# Altium PCB Doorsensor_433MHz.PcbDoc
Units mil, origin at the board's own origin, x right, y up, seen from the top; angles counter-clockwise.
Board outline 1113.09 x 1908.09 mil, 2 copper layers (Top Layer, Bottom Layer); 26 components, 14 nets, 61 pads, 71 vias.
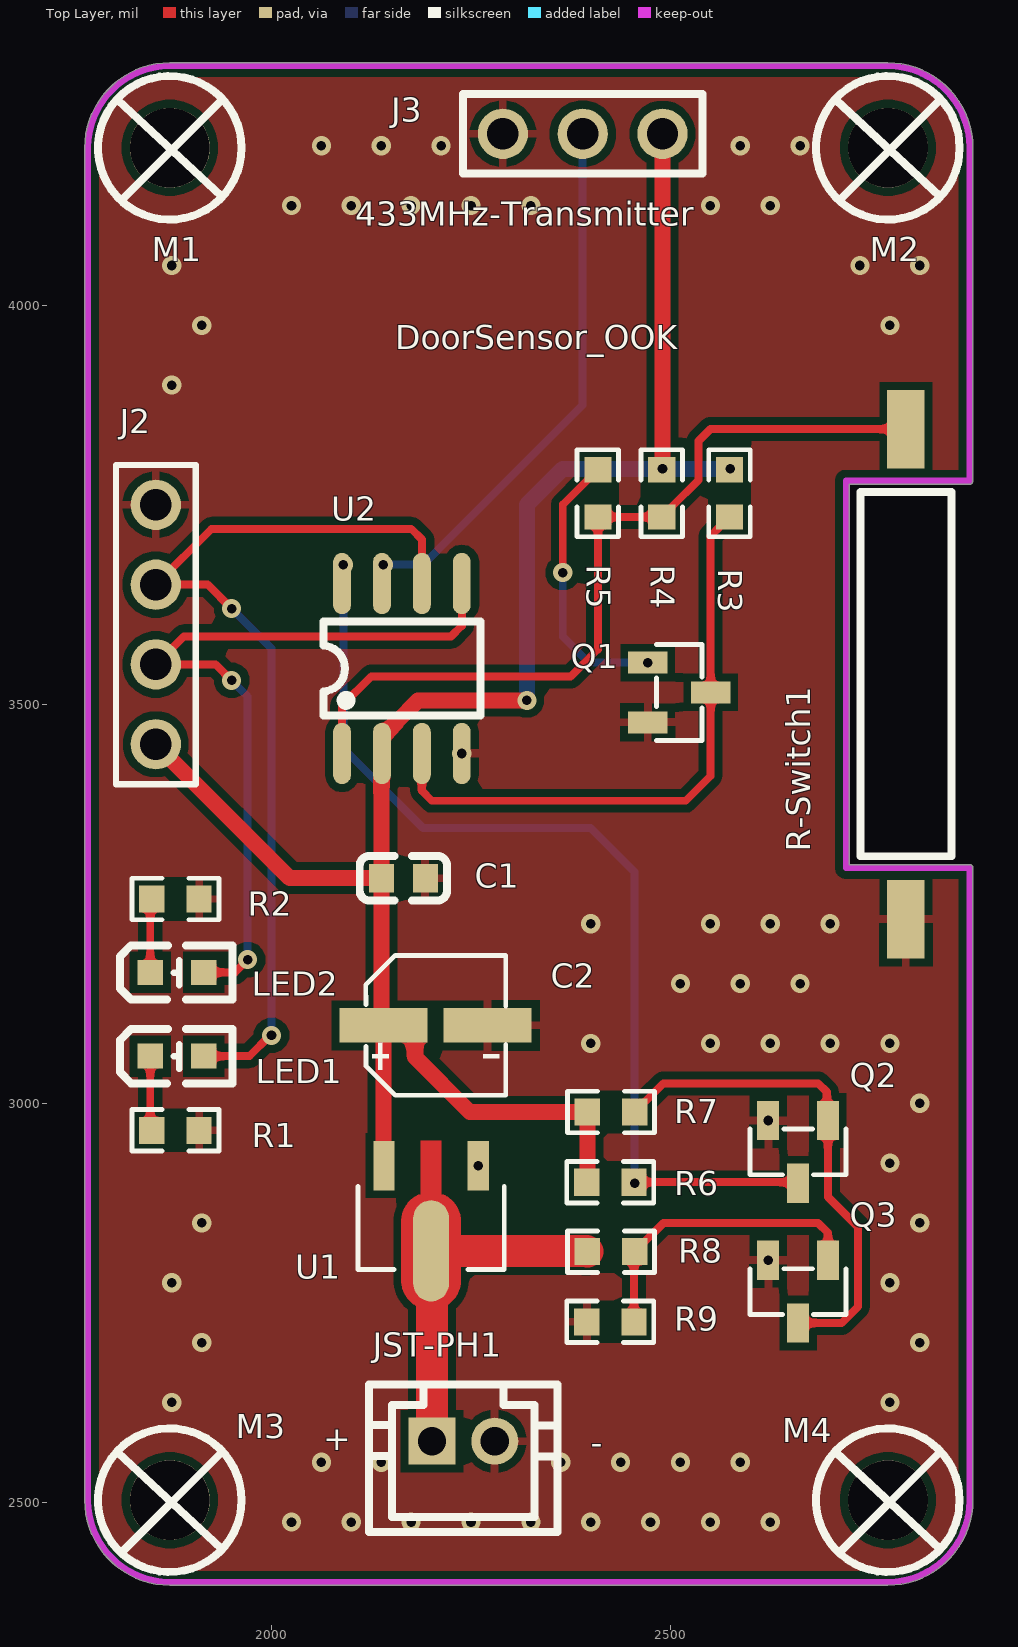
[diagram p0: Top Layer view]
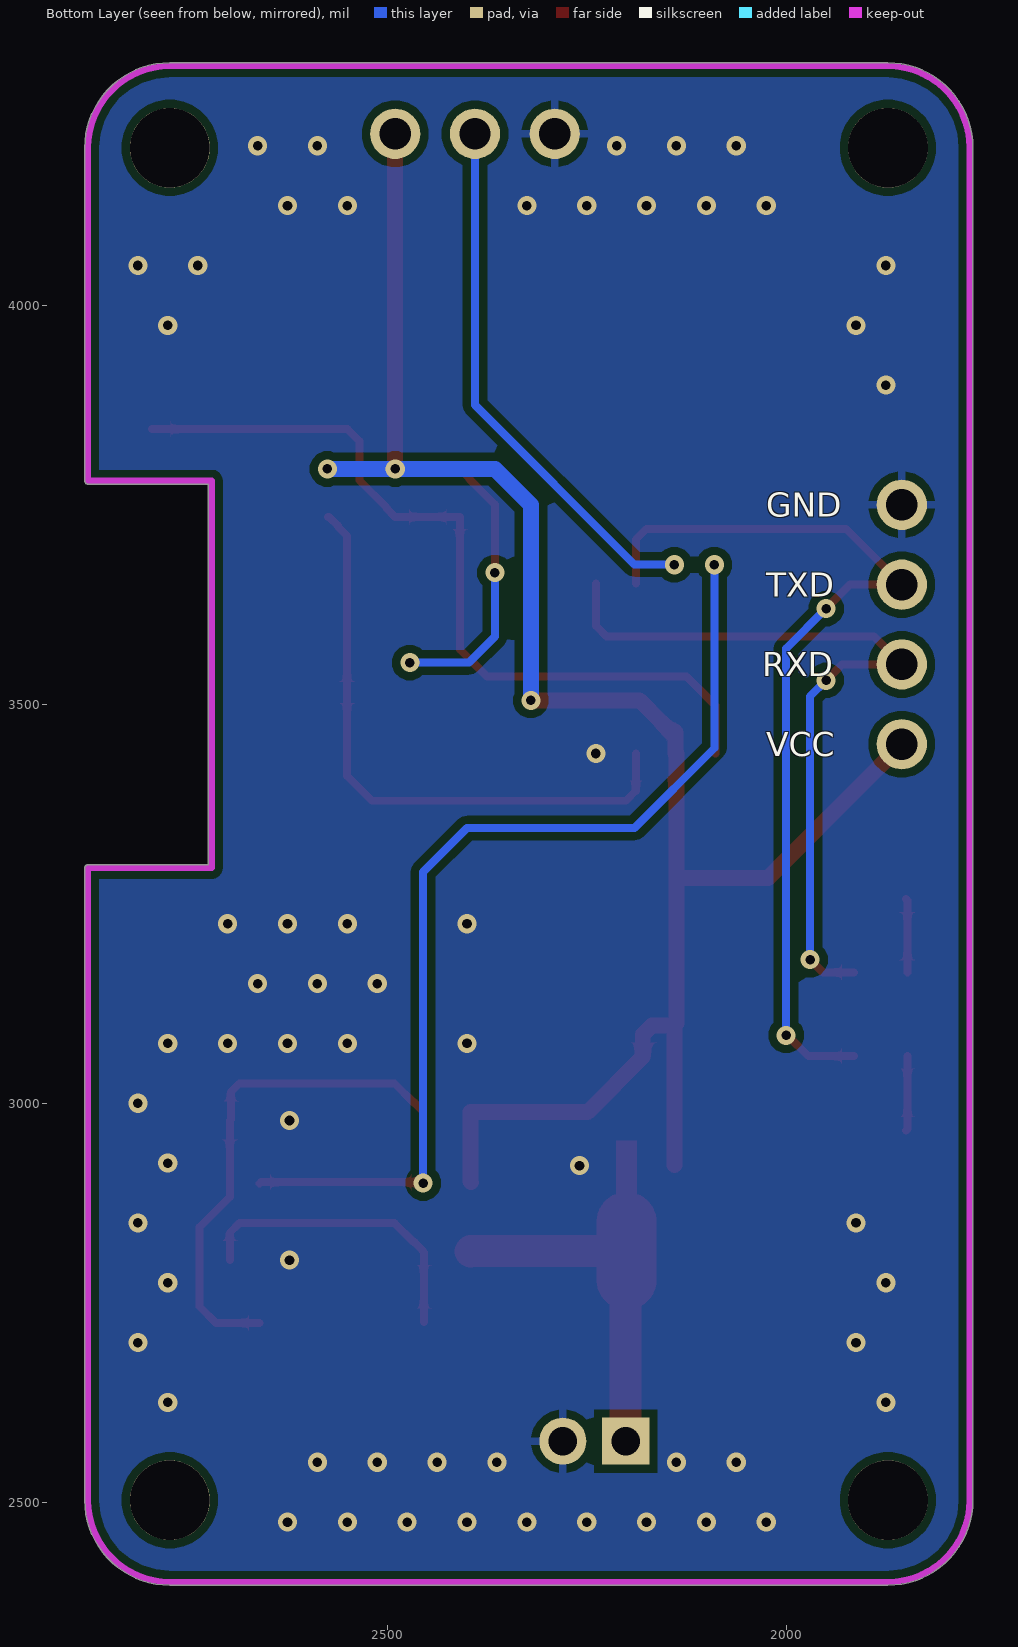
[diagram p1: Bottom Layer view, seen from below]
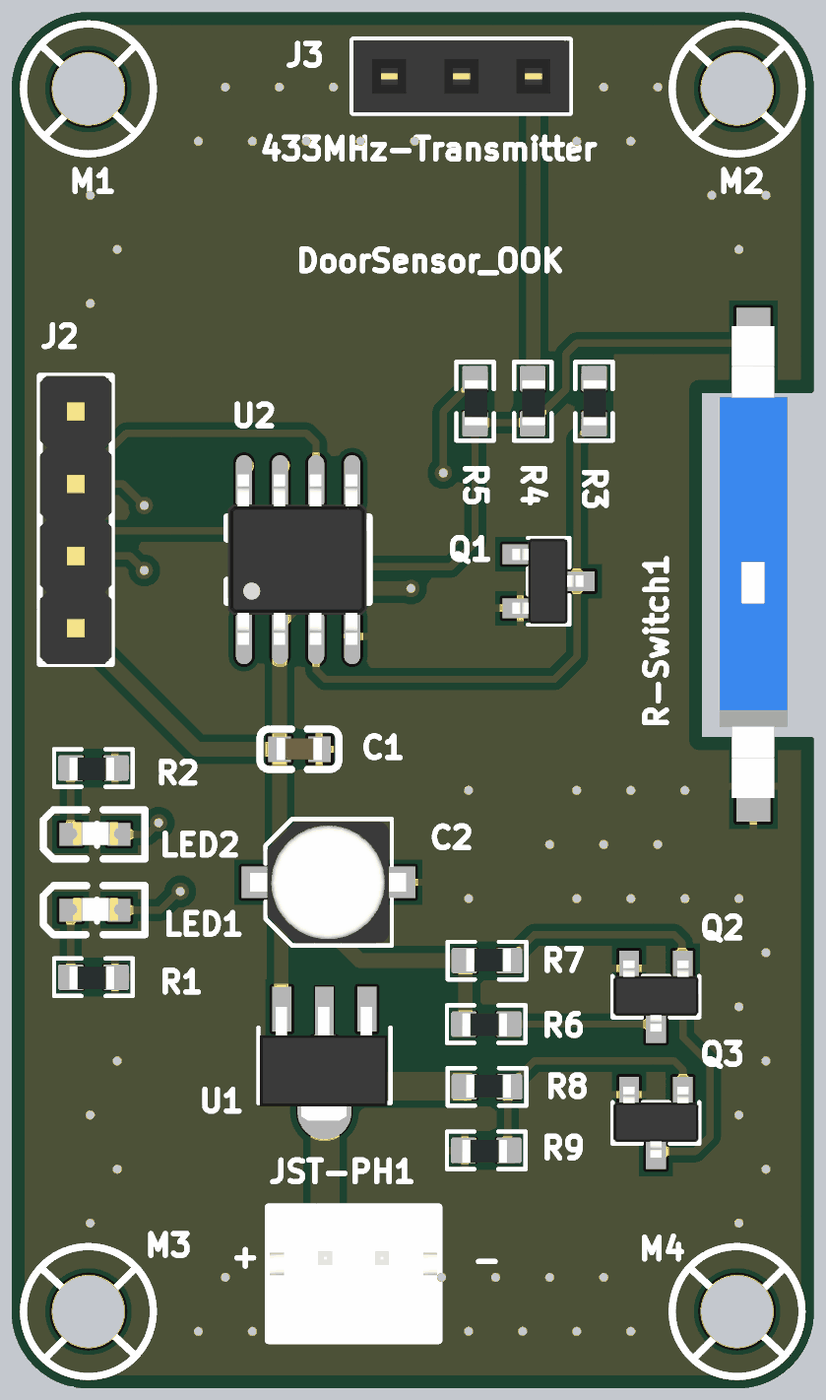
[diagram p2: 3D render of the assembled board from above, using the file's embedded part models]

## Layer stack, top to bottom
Top Solder: solder mask 0.4, Solder Resist, Dk 3.5
Top Layer: signal copper 1.4
Dielectric 1: dielectric 12.6, FR-4, Dk 4.8
Bottom Layer: signal copper 1.4
Bottom Solder: solder mask 0.4, Solder Resist, Dk 3.5

## Board outline
1765.98,2502.99 1765.98,4197.01 1765.95,4197.5 cw(c1872.5,4197.5) 1872.5,4304.05 1872.99,4304.01 2772.01,4304.01 2772.5,4304.05 cw(c2772.5,4197.5) 2879.05,4197.5 2879.01,4197.01 2879.01,3780 cw(c2875,3780) 2875,3775.99 2724.01,3775.99 2724.01,3299.01 2875,3299.01 cw(c2875,3295) 2879.01,3295 2879.01,2502.99 2879.05,2502.5 cw(c2772.5,2502.5) 2772.5,2395.95 2772.01,2395.98 1872.99,2395.98 1872.5,2395.95 cw(c1872.5,2502.5)

## Design rules (kind name [scope] priority, off if disabled: settings)
Clearance [All] p1: gap=10 ignorepadtopadclearanceinfootprint=FALSE except(0: Arc-Hole Track-Hole SMDPad-Hole THPad-Hole Via-Hole Fill-Hole Poly-Hole Region-Hole Text-Hole)
PolygonConnect PolygonConnect_Via [IsVia] p1: connectstyle=Direct reliefconductorwidth=10 reliefentries=4 polygonreliefangle="90 Angle" airgapwidth=10
PolygonConnect PolygonConnect_Pad [All] p2: connectstyle=Relief reliefconductorwidth=10 reliefentries=4 polygonreliefangle="90 Angle" airgapwidth=10
RoutingVias RoutingVias_1 [All] p1: holewidth=28 width=50 viastyle="Through Hole" minholewidth=28 minwidth=50 maxholewidth=28 maxwidth=50
SolderMaskExpansion [All] p1: expansion=4 istentingtop=FALSE
Width Routing [All] p1: maxlimit=40 minlimit=10 preferedwidth=10 minimp=50.000000 maximp=50.000000 favimp=50.000000
Width VCC [InNet('VCC')] p2: maxlimit=50 minlimit=10 preferedwidth=20 minimp=50.000000 maximp=50.000000 favimp=50.000000
Width GND [InNet('GND')] p3: maxlimit=50 minlimit=10 preferedwidth=20 minimp=50.000000 maximp=50.000000 favimp=50.000000
30 further rules are at their usual default settings.

## Components (designator, comment, footprint, x,y, rotation, side; value= is the part's Value field where it differs from the comment)
C1 "100nF" C0603 2165,3280 r180 top
C2 "22uF/16V" C(Electrolytic)_SMD-D4.0mm_L5.4mm 2205,3095 r0 top
J2 "PinHeader_4Pin" PinHeader_4Pin-2.54mm 1855,3600 r90 top
J3 "PinHeader_3Pin" PinSocket_3Pin-2.54mm 2390,4215 r180 top
JST-PH1 "JST-PH2.0_2Pin-TH-Vertical" Connector-JST-PH2.0-2Pin_TH-Vertical 2240,2570 r0 top
LED1 "0603" LED0603-Castellated 1885,3060 r0 top
LED2 "0603" LED0603-Castellated 1885,3165 r0 top
M1 "PCB Mounting Hole" "PCB Mounting Hole" 1875,4195 r0 top
M2 "PCB Mounting Hole" "PCB Mounting Hole" 2775,4195 r0 top
M3 "PCB Mounting Hole" "PCB Mounting Hole" 1875,2500 r0 top
M4 "PCB Mounting Hole" "PCB Mounting Hole" 2775,2500 r0 top
Q1 "9014/SOT-23" SOT-23-3 2505,3515 r180 top
Q2 "9014/SOT-23" SOT-23-3 2660,2945 r90 top
Q3 "9014/SOT-23" SOT-23-3 2660,2770 r90 top
R1 "560Ω" R0603 1880,2965 r0 top value=10MΩ
R2 "560Ω" R0603 1880,3255 r0 top value=10MΩ
R3 "10MΩ" R0603 2575,3765 r90 top
R4 "4.7MΩ" R0603 2490,3765 r90 top value=10MΩ
R5 "2MΩ" R0603 2410,3765 r90 top value=10MΩ
R6 "10MΩ" R0603 2425,2900 r0 top
R7 "4.7MΩ" R0603 2425,2990 r180 top value=10MΩ
R8 "10MΩ" R0603 2425,2815 r180 top
R9 "750KΩ" R0603 2425,2725 r0 top value=10MΩ
R-Switch1 "CT10-G1" "Reed Switch_Molded-SMD_SPST" 2792.09,3536.62 r90 top
U1 "HT7333A" SOT89-3 2201.57,2871.11 r90 top
U2 "STC15W104" SOIC_8Pin-L5.0-W4.0 2165,3545 r0 top

## Footprints (in the part's own frame and the unit in brackets; to place one, negate y for a bottom-side part, rotate by r counter-clockwise, add the part's x,y. Pads: shape width x height; smd on the part's side, far side on the other; paste and mask are expansions set on the pad)
C0603 [mm]
  rect 0.8x0.9 smd: 1(-0.707,-0.052) 2(0.693,-0.052)
  silkscreen extent -1.4,-0.76 1.38,0.66, body extent -0.8,-0.46 0.8,0.34, height 0.8
C(Electrolytic)_SMD-D4.0mm_L5.4mm [mm]
  rect 2.8x1.1 smd: 1(-1.648,0.067) 2(1.673,0.067)
  silkscreen extent -2.2,-2.16 2.25,2.29, body extent -2.75,-2.09 2.75,2.21, height 5.4
Connector-JST-PH2.0-2Pin_TH-Vertical [mm] "Wire to Board Connector, Direct Insert Push-Pull, P=2mm,"
  rect 1.5x1.5 hole 0.9 paste-2539.97 mask+0.05: 1(-0.988,0.166)
  round 1.5 hole 0.9 paste-2539.97 mask+0.05: 2(1.012,0.166)
  silkscreen extent -2.99,-2.73 3.01,1.97, body extent -2.94,-2.63 2.96,1.92, height 6
LED0603-Castellated [mil]
  rect 31.5x31.5 smd: 1(30,-1) 2(-37,-1)
  silkscreen extent -75,-35 66,33, body extent -34,-16 29,16, height 43
"PCB Mounting Hole" [mil]
  round 100 hole 100 paste-99999 mask+4: 1(-2.5,2.5)
  silkscreen extent -92,-87 88,92
PinHeader_4Pin-2.54mm [mm]
  round 1.6 hole 1: 1(-3.81,0) 2(-1.27,0) 3(1.27,0) 4(3.81,0)
  silkscreen extent -5.08,-1.27 5.08,1.27, body extent -5.08,-1.27 5.08,1.27, height 8.54
PinSocket_3Pin-2.54mm [mm]
  round 1.6 hole 1: 1(-2.54,0)
  round 1.6 hole 1 paste-2539.97: 2(0,0) 3(2.54,0)
  silkscreen extent -3.81,-1.27 3.81,1.27, body extent -3.81,-1.27 3.81,1.27, height 7
R0603 [mil]
  rect 31.75x34.02 smd paste-3937.01 mask+2: 1(-30.13,1.01) 2(29.19,1.01)
  silkscreen extent -55,-25 54,27, body extent -34,-16 29,16, height 18
"Reed Switch_Molded-SMD_SPST" [mm] "Gull-Wing, overmolded SMD Reed Switch 11.43mm x 2.29mm x 2.29mm(G1)"
  rect 2.5x1.2 smd: 1(-7.767,-0.074) 2(7.833,-0.074)
  silkscreen extent -5.77,-1.52 5.83,1.38, body extent -8.18,-1.26 8.44,1.14, height 2.9
SOIC_8Pin-L5.0-W4.0 [mm]
  oval 0.568x1.95 smd: 1(-1.945,-2.708) 2(-0.675,-2.708) 3(0.595,-2.708) 4(1.865,-2.708) 5(1.865,2.702) 6(0.595,2.702) 7(-0.675,2.702) 8(-1.945,2.702)
  silkscreen extent -2.54,-1.5 2.46,1.5, body extent -2.51,-3 2.39,3, height 1.75
SOT89-3 [mm]
  rect 1.575x0.672 smd: 1(1.287,-1.46) 3(1.287,1.54)
  oval 3.226x1.14 smd: 2(-1.425,0.04)
  Top Layer region: -2.352,0.99 -0.498,0.99 -0.454,0.989 -0.409,0.986 -0.365,0.98 -0.321,0.973 -0.277,0.964 -0.234,0.953 -0.192,0.939 -0.15,0.924 -0.109,0.907 -0.069,0.887 -0.03,0.866 0.009,0.843 0.046,0.819 0.082,0.792 0.116,0.764 0.15,0.735 0.182,0.704 0.212,0.671 0.241,0.637 0.268,0.602 0.293,0.565 0.317,0.528 0.339,0.489 0.359,0.449 0.377,0.37 2.075,0.37 2.075,-0.29 0.377,-0.29 0.359,-0.369 0.339,-0.409 0.317,-0.448 0.293,-0.486 0.268,-0.522 0.241,-0.557 0.212,-0.591 0.182,-0.624 0.15,-0.655 0.116,-0.685 0.082,-0.713 0.046,-0.739 0.009,-0.764 -0.03,-0.787 -0.069,-0.808 -0.109,-0.827 -0.15,-0.844 -0.192,-0.859 -0.234,-0.873 -0.277,-0.884 -0.321,-0.893 -0.365,-0.901 -0.409,-0.906 -0.454,-0.909 -0.498,-0.91 -2.352,-0.91 -2.397,-0.909 -2.441,-0.906 -2.485,-0.901 -2.529,-0.893 -2.573,-0.884 -2.616,-0.873 -2.659,-0.859 -2.7,-0.844 -2.741,-0.827 -2.782,-0.808 -2.821,-0.787 -2.859,-0.764 -2.896,-0.739 -2.932,-0.713 -2.967,-0.685 -3,-0.655 -3.032,-0.624 -3.062,-0.591 -3.091,-0.557 -3.118,-0.522 -3.144,-0.486 -3.167,-0.448 -3.189,-0.409 -3.21,-0.369 -3.228,-0.329 -3.244,-0.287 -3.258,-0.245 -3.271,-0.202 -3.281,-0.159 -3.29,-0.115 -3.296,-0.071 -3.3,-0.027 -3.302,0.018 -3.302,0.062 -3.3,0.107 -3.296,0.151 -3.29,0.195 -3.281,0.239 -3.271,0.282 -3.258,0.325 -3.244,0.367 -3.228,0.409 -3.21,0.449 -3.189,0.489 -3.167,0.528 -3.144,0.565 -3.118,0.602 -3.091,0.637 -3.062,0.671 -3.032,0.704 -3,0.735 -2.967,0.764 -2.932,0.792 -2.896,0.819 -2.859,0.843 -2.821,0.866 -2.782,0.887 -2.741,0.907 -2.7,0.924 -2.659,0.939 -2.616,0.953 -2.573,0.964 -2.529,0.973 -2.485,0.98 -2.441,0.986 -2.397,0.989 -2.352,0.99
  silkscreen extent -2.02,-2.29 0.63,2.37, body extent -2.64,-2.19 1.37,2.31, height 1.52
SOT-23-3 [mm]
  rect 1.25x0.7 smd: 1(0.847,-0.948) 2(0.847,0.952) 3(-1.153,0.002)
  silkscreen extent -0.88,-1.52 0.57,1.53, body extent -1.38,-1.5 1.12,1.5, height 1.2

## Part data
C1: library part Capacitor_0603
C2: library part Capacitor_Electrolytic-SMD-D4.0xL5.4mm
J2 J3: "Straight Single Row, Square Pitch, 2.54mm"
LED1 LED2: library part LED_0603
M1 M2 M3 M4: "Mounting Hole"
Q1 Q2 Q3: library part NPN_SOT-23-3
R1 R2 R3 R4 R5 R6 R7 R8 R9: library part Resistor_0603
R-Switch1: library part Reed-Switch_Molded-SMD
U1: library part LDO_SOT89-3
U2: library part STC15W104_SOP8

## Via types
v1: diameter 24, hole 12, Top Layer to Bottom Layer, tented both sides, 71 vias

## Nets (pads, with @x,y where several pads share a name; then routed paths per layer and width w, separated by ;. In a path a pad name is that pad's centre, name@x,y a point inside that pad or via, vN(x,y) a via of type N, cw(c..) or ccw(c..) an arc to the next point about the centre after c; other vN are vias at no path point)
BAT: JST-PH1.1 R8.2 U1.2 | length 435.2
  Top Layer w40: JST-PH1.1 2201.1,2771.51 2200,2772.61 U1.2 2394.8,2815 R8.2
"Battery Low": Q2.3 R6.2 U2.8 | length 1255.5
  Top Layer w10: R6.2 2658.51,2901.01 Q2.3
  Bottom Layer w10: v1(2090,3675) 2090,3445 2190,3345 2400,3345 2455,3290 v1(2455,2900)
Close: R4.1 R5.1 R-Switch1.2 U2.1 | length 1036.8
  Top Layer w10: U2.1 2088.43,3498.43 2125,3535 2375,3535 2408.99,3568.99 R5.1 R4.1 2490.12,3734.87 2501,3745.75 2501,3746.88 2535,3780.88 2535,3830 2550,3845 R-Switch1.2
GND: C1.1 C2.2 J2.4 J3.3 JST-PH1.2 Q1.2 Q2.2 Q3.2 R1.2 R2.2 R9.1 R-Switch1.1 U1.1 U2.4
  other v1: 2025,2475 2100,2475 2175,2475 2250,2475 2325,2475 2400,2475 2475,2475 2550,2475 2625,2475 2062.5,2550 2137.5,2550 2362.5,2550 2437.5,2550 2512.5,2550 2587.5,2550 1875,2625 2775,2625 1912.5,2700 2812.5,2700 1875,2775 2775,2775 2622.51,2803.35 1912.5,2850 2812.5,2850 2259.05,2921.79 2775,2925 2622.51,2978.35 2812.5,3000 2400,3075 2550,3075 2625,3075 2700,3075 2775,3075 2512.5,3150 2587.5,3150 2662.5,3150 2400,3225 2550,3225 2625,3225 2700,3225 2238.43,3438.39 1875,3900 1912.5,3975 2775,3975 1875,4050 2737.5,4050 2812.5,4050 2025,4125 2100,4125 2175,4125 2250,4125 2325,4125 2550,4125 2625,4125 2062.5,4200 2137.5,4200 2212.5,4200 2587.5,4200 2662.5,4200
NetLED1_2: LED1.2 R1.1 | length 93.8
  Top Layer w10: LED1.2 1848,2967.88 R1.1
NetLED2_2: LED2.2 R2.1 | length 92.8
  Top Layer w10: LED2.2 1848,3254.14 R2.1
NetQ1_1: Q1.1 R5.2 | length 348.3
  Top Layer w10: v1(2365,3665) 2365,3750.2 2396.98,3782.18 2396.98,3783.32 2407.86,3794.19 R5.2
  Bottom Layer w10: v1(2365,3665) 2365,3585 2397.69,3552.31 v1(2471.65,3552.31)
NetQ2_1: Q2.1 Q3.3 R7.1 | length 629.7
  Top Layer w10: R7.1 2455.13,2990.12 2466,3001 2467.14,3001 2491.14,3025 2685,3025 2696.01,3013.99 2696.01,2979.65 Q2.1 2697.31,2882.69 2735,2845 2735,2745 2714.61,2724.61 Q3.3
NetQ3_1: Q3.1 R8.1 R9.2 | length 385.6
  Top Layer w10: R9.2 2454.19,2813.05 R8.1 2455.13,2815.12 2466,2826 2467.14,2826 2491.14,2850 2685,2850 2697.31,2837.69 Q3.1
"OOK SendData": J3.2 U2.7 | length 672.8
  Bottom Layer w10: v1(2140,3675) 2190,3675 2390,3875 J3.2
Open: Q1.3 R3.1 U2.3 | length 761.8
  Top Layer w10: U2.3 2188.43,3391.57 2200.86,3379.14 2519.14,3379.14 2550.39,3410.39 Q1.3 2550.39,3711.27 2561.98,3722.86 2561.98,3724 2572.86,3734.87 R3.1
RXD: J2.2 LED2.1 U2.5 | length 979.6
  Top Layer w10: LED2.1 1954,3164 v1(1970,3180) ; v1(1950,3530) 1930,3550 J2.2 1890,3585 2225,3585 2238.43,3598.43 U2.5
  Bottom Layer w10: v1(1950,3530) 1970,3510 v1(1970,3180)
TXD: J2.3 LED1.1 U2.6 | length 1182.1
  Top Layer w10: LED1.1 1972.14,3059 1998.14,3085 v1(2000,3085) ; v1(1950,3620) 1920,3650 J2.3 1925,3720 2175,3720 2188.43,3706.57 U2.6
  Bottom Layer w10: v1(1950,3620) 2000,3570 v1(2000,3085)
VCC: C1.2 C2.1 J2.1 J3.1 R3.2 R4.2 R6.1 R7.2 U1.3 U2.2 | length 2437.9
  Top Layer w20: J2.1 2022.95,3282.05 C1.2 ; U2.2@2137.72,3438.39 C1.2 ; U2.2 2138.43,3464.95 2139.52,3466.05 2144.79,3466.05 2157.24,3478.5 2183.73,3505 v1(2320,3505) ; U1.3@2140.12,2922.61 C2.1 ; R6.1 2395.81,2901.95 R7.2 2248.77,2988.99 2179.72,3058.05 2179.72,3085.99 2168.06,3097.65 C2.1 ; v1(2490,3795) J3.1 ; C1.2 2137.72,3100.05 C2.1
  Bottom Layer w20: v1(2320,3505) 2320,3750 2365,3795 v1(2490,3795) v1(2575,3795)
pads on no net: M1.1 M2.1 M3.1 M4.1

## Polygon pours and split planes (outlines as drawn)
GND on Top Layer "GND_L01_P000" (solid, remove dead copper, pour order 0): 1760,4305 2880,4305 2880,3775 2725,3775 2725,3300 2880,3300 2880,2395 1765,2395
GND on Bottom Layer "GND_L02_P001" (solid, remove dead copper, pour order 1): 1765,4305 2880,4305 2880,3775 2725,3775 2725,3300 2880,3300 2880,2395 1765,2395

## Keep-outs
Keep-Out Layer:
  lines w8: 1769.97,2502.5 ccw(c1872.5,2502.5) 1872.5,2399.97 ; 1769.97,4197.5 cw(c1872.5,4197.5) 1872.5,4300.03 ; 1770,2502.5 1770,4197.5 ; 1872.5,2400 2772.5,2400 ; 1872.5,4300 2772.5,4300 ; 2772.5,2399.97 ccw(c2772.5,2502.5) 2875.03,2502.5 ; 2772.5,4300.03 cw(c2772.5,4197.5) 2875.03,4197.5 ; 2875,2502.5 2875,3295 2720,3295 2720,3780 2875,3780 2875,4197.5

## Other copper
Top Layer:
  pour cut-out: 2153.71,3045 2213.47,3045 2290,2968.47 2290,2845 2170,2845 2156.24,2858.76

## Silkscreen, mask and mechanical layers (free items; w line width, h text height)
Top Overlay:
  text "433MHz-Transmitter" at 2105,4100 h30
  text "DoorSensor_OOK" at 2155,3945 h30
  text "+" at 2065,2565 h30
  text "-" at 2400,2560 h30
Bottom Overlay:
  text "GND" at 2025,3735 h30
  text "TXD" at 2025,3635 h30
  text "RXD" at 2030,3535 h30
  text "VCC" at 2025,3435 h30